# Altium PCB demo_dermis_main_testboard_scratch.PcbDoc (part 3 of 7)
Units mm, origin at the board's own origin, x right, y up, seen from the top; angles counter-clockwise.
Board outline 348.67 x 247.5 mm, 4 copper layers (Top Layer, Layer 1, Layer 2, Bottom Layer), stack 0.603 mm thick; 416 components, 288 nets, 1934 pads, 1690 vias.
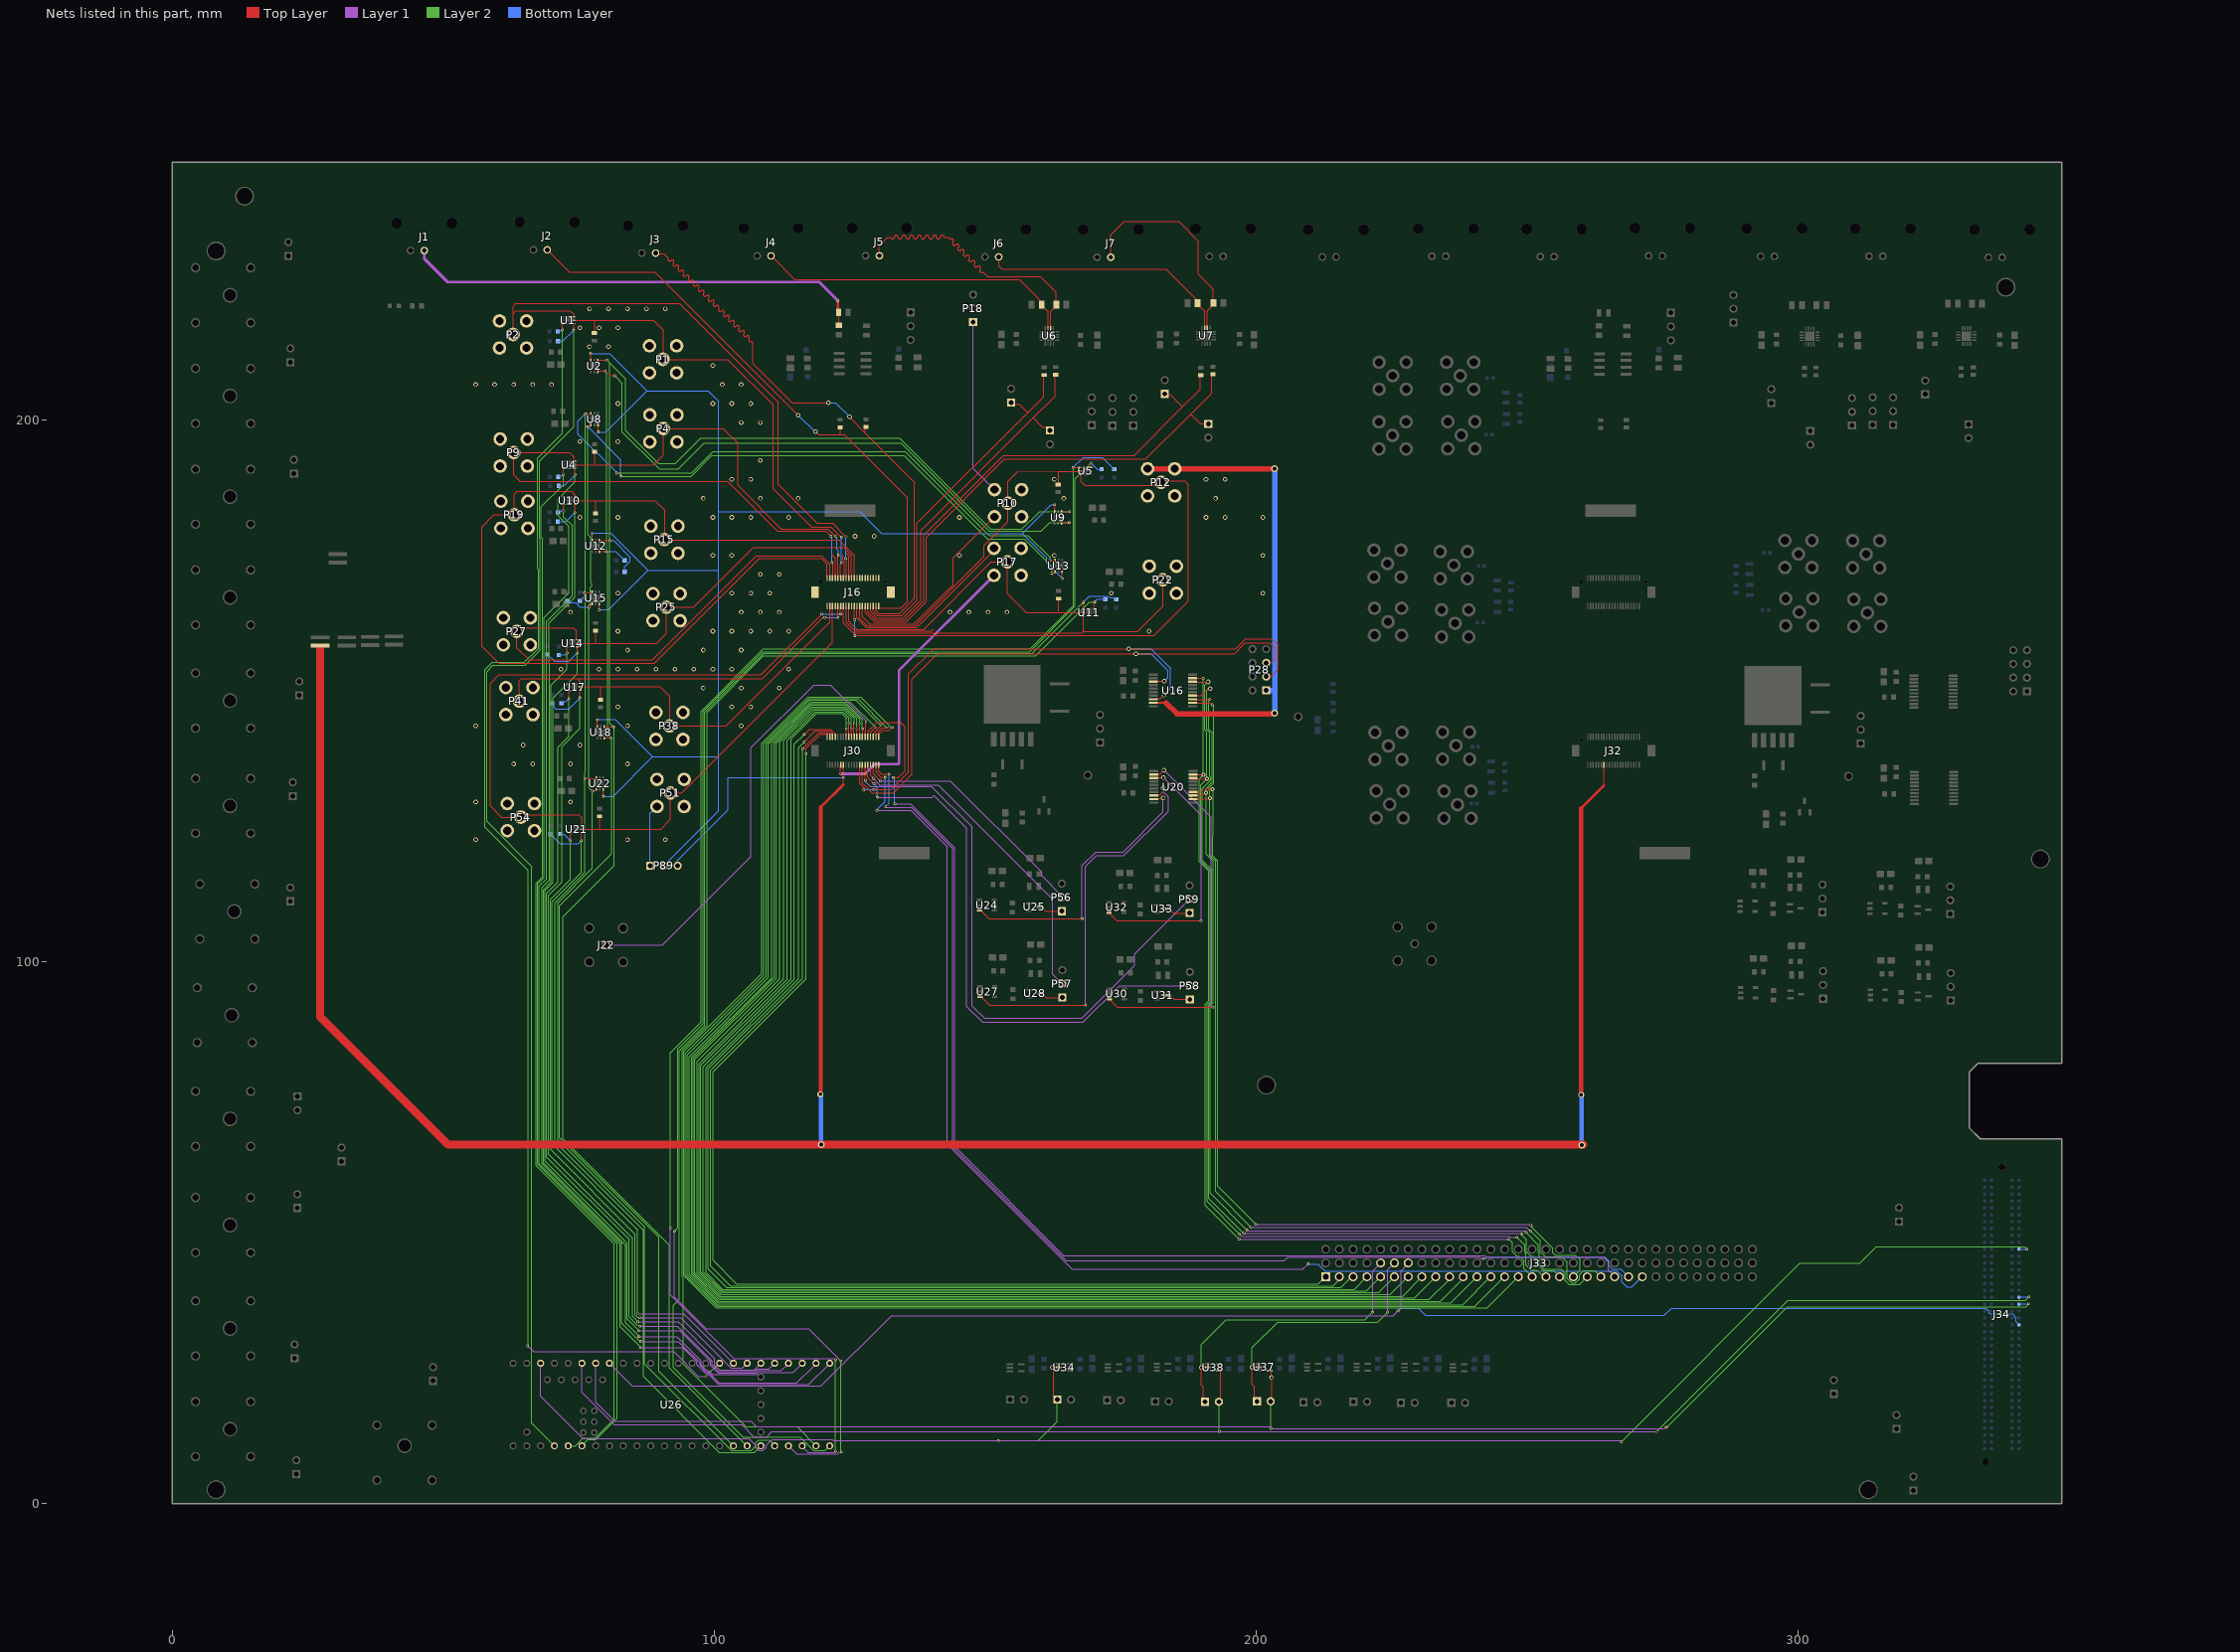
[diagram p4: the nets of this part, all layers, seen from the top]

## Via types
v1: diameter 0.85, hole 0.5, Top Layer to Bottom Layer, 1036 vias
v2: diameter 0.5, hole 0.3, Top Layer to Bottom Layer, 455 vias
v3: diameter 1.27, hole 0.711, Top Layer to Bottom Layer, 133 vias
v4: diameter 0.7, hole 0.4, Top Layer to Bottom Layer, 26 vias
v5: diameter 0.4, hole 0.25, Top Layer to Bottom Layer, 24 vias
v6: diameter 1.1, hole 0.7, Top Layer to Bottom Layer, 16 vias

## Nets (pads, with @x,y where several pads share a name; then routed paths per layer and width w, separated by ;. In a path a pad name is that pad's centre, name@x,y a point inside that pad or via, vN(x,y) a via of type N, cw(c..) or ccw(c..) an arc to the next point about the centre after c; other vN are vias at no path point) (continued)
ACK_EXT: J34.C11 P60.1 U26.1 U34.2 | length 326.3
  Top Layer w0.15: P60.1@163.298,19.176 162.622,19.851 162.622,24.719 162.397,24.945 v1(162.397,25.134) 162.399,25.136 163.543,25.136 U34.2@163.545,25.138
  Layer 1 w0.15: U26.1@67.985,25.89 67.985,19.817 75.792,12.011 106.392,12.011 107.652,10.75 107.652,10.38 108.261,9.771 108.99,9.771 109.599,10.38 109.599,10.75 110.459,11.611 110.53,11.611 110.698,11.779 121.793,11.779 121.961,11.611 267.052,11.611 267.267,11.395 v2(267.362,11.395)
  Layer 2 w0.15: v2(152.432,11.611) 159.75,11.611 163.298,15.159 P60.1@163.298,19.176 ; v2(267.362,11.395) 300.332,44.365 311.386,44.365 314.386,47.365 341.796,47.365 v2(342.218,46.943)
  Bottom Layer w0.15: J34.C11@340.746,46.956 340.752,46.949 342.212,46.949 v2(342.218,46.943)
ADDRX0: J33.14 P65.1 U38.2 | length 55.9
  Top Layer w0.15: P65.1@190.245,18.519 190.245,21.547 189.879,21.913 v1(189.879,25.129) v1(189.879,25.129) 191.026,25.132 U38.2@191.028,25.134
  Layer 1 w0.15: v2(221.451,35.324) 221.474,35.348 221.474,42.912 J33.14@222.964,44.403
  Layer 2 w0.15: v1(189.879,25.129) 189.879,29.364 194.464,33.949 220.074,33.949 v2(221.451,35.324)
ADDRX0_EXT: J34.C18 P65.2 U26.4 U38.4 | length 299.6
  Top Layer w0.15: U38.4@193.337,24.484 193.357,24.484 193.46,24.381 P65.2@193.46,18.785
  Layer 1 w0.15: U26.4@75.605,25.89 75.605,20.533 75.614,20.533 81.577,14.57 105.105,14.57 107.365,12.311 109.703,12.311 110.671,13.279 v2(193.214,13.279) 193.232,13.26 273.826,13.26 v2(273.844,13.242)
  Layer 2 w0.15: P65.2@193.123,18.785 193.169,18.739 193.169,13.324 v2(193.214,13.279) ; v2(273.844,13.242) 298.132,37.53 341.97,37.53 v2(342.577,38.138)
  Bottom Layer w0.15: J34.C18@340.746,38.066 340.781,38.102 342.541,38.102 v2(342.577,38.138)
ADDRY0: J33.17 P64.1 U37.2 | length 48.9
  Top Layer w0.15: P64.1@199.674,18.519 199.674,21.541 199.252,21.964 v1(199.252,25.174) 199.254,25.176 200.398,25.176 U37.2@200.4,25.179
  Layer 1 w0.15: v2(224.284,35.334) 224.284,43.182 J33.17@225.504,44.403
  Layer 2 w0.15: v1(199.252,25.174) 199.252,28.77 203.984,33.503 222.452,33.503 v2(224.284,35.334)
ADDRY0_EXT: J34.C19 P64.2 U26.5 U37.4 | length 297.1
  Top Layer w0.15: U37.4@202.483,24.528 202.727,24.528 202.83,24.426 202.83,23.312 202.89,23.252 P64.2@202.89,18.872 ; v1(202.83,23.252) U37.4@202.83,24.528
  Layer 1 w0.15: U26.5@78.145,25.89 78.145,18.675 81.633,15.186 106.817,15.186 107.784,14.219 202.371,14.219 v2(202.717,13.874) 275.345,13.874 275.562,14.091 v2(275.657,14.091)
  Layer 2 w0.15: P64.2@202.675,18.872 202.696,18.851 202.696,13.894 v2(202.717,13.874) ; v2(275.657,14.091) 275.772,14.091 298.023,36.342 342.004,36.342 v2(342.495,36.833)
  Bottom Layer w0.15: J34.C19@340.746,36.796 340.764,36.814 342.476,36.814 v2(342.495,36.833)
AER_DIS: J33.20 J34.C22 U26.6 | length 280.4
  Layer 1 w0.15: U26.6@80.685,25.89 84.886,21.689 119.721,21.689 132.694,34.662 225.268,34.662 v2(226.156,35.55) 226.71,36.104 226.71,42.93 228.044,44.264 J33.20@228.044,44.403
  Bottom Layer w0.15: v2(226.156,35.55) 226.626,36.02 229.926,36.02 231.219,34.727 275.266,34.727 276.609,36.071 334.621,36.071 335.12,35.571 335.12,35.3 335.44,34.981 335.891,34.981 339.521,34.981 340.176,34.325 340.176,33.555 J34.C22@340.746,32.986
AGND: J30.28 J32.28 P89.3 R16.2 | length 494.6
  Top Layer w0.2: 123.836,132.662 v5(123.836,133.975) J30.28@123.836,136.465 ; 264.169,132.527 J32.28@264.169,136.33
  Top Layer w0.5: 119.668,128.494 123.836,132.662 ; 259.969,128.327 264.169,132.527
  Top Layer w0.8: v6@119.668,75.99 119.668,128.494 ; v6@259.969,75.888 259.969,128.327
  Top Layer w1.5: 27.31,157.646 27.31,89.827 50.888,66.249 v3@260.345,66.249
  Bottom Layer w0.2: P89.3@93.273,117.712 93.243,117.742 93.243,118.712 102.557,128.026 102.557,133.975 v5(123.836,133.975)
  Bottom Layer w0.8: v3@119.681,66.359 v6@119.681,75.474 ; v3@260.015,66.225 v6@260.015,75.339
  other v3: 260.088,66.152 119.754,66.286
  other v6: 259.942,75.412 119.608,75.547
AGND_VCM: P89.2 U2.3 U8.3 U9.3 U12.3 U13.3 U15.3 U18.3 U22.3 | length 292.8
  Top Layer w0.15: v2(77.214,212.25) 77.214,211.019 U2.3@77.241,210.991 ; v2(77.482,179.079) 77.482,177.848 77.51,177.821 U12.3@77.49,177.713 ; U18.3@78.418,143.334 78.446,143.378 78.418,143.406 v2(78.418,144.637) ; U8.3@78.571,199.095 78.574,199.016 78.601,198.988 v2(78.601,197.757) ; U15.3@78.764,166.202 78.791,166.175 v2(78.791,164.943) ; U22.3@79.529,131.82 79.514,131.783 79.542,131.756 v2(79.542,130.525) ; v2(162.825,184.321) 162.825,183.09 U9.3@162.853,183.062 ; v2(164.218,170.718) 164.218,171.95 164.191,171.977 U13.3@164.22,172.008
  Bottom Layer w0.15: v2(78.601,197.757) 79.974,197.757 ; 87.588,205.354 87.588,205.37
  Bottom Layer w0.2: v2(77.214,212.25) 80.709,212.25 87.588,205.37 79.974,197.757 ; v2@77.453,179.12 80.948,179.12 87.828,172.241 80.555,164.969 v2@78.791,164.969 ; v2@78.252,144.688 78.418,144.688 81.747,144.688 88.626,137.809 81.338,130.52 v2@79.542,130.52 ; 87.588,205.354 98.862,205.354 100.837,203.378 100.837,183.083 100.837,172.224 ; 87.828,172.224 100.837,172.224 ; 88.626,137.791 100.817,137.791 ; P89.2@90.733,117.712 100.837,127.816 100.837,137.791 100.837,172.224 ; 100.864,183.083 126.818,183.083 130.88,179.021 156.835,179.021 ; v2(162.825,184.321) 162.134,184.321 156.835,179.021 ; v2(164.218,170.718) 161.362,173.574 161.362,174.494 156.835,179.021
CHIPA_ACK: J30.37 J33.4 | length 227.9
  Top Layer w0.15: v2(116.35,139.283) 119.348,142.282 121.062,142.282 121.345,141.999 J30.37@121.345,141.48
  Layer 2 w0.15: 103.007,40.169 103.012,40.169 ; v2(116.35,139.283) 116.304,139.238 116.304,96.898 99.341,79.935 99.341,43.841 103.012,40.169 ; J33.4@215.344,41.863 215.344,41.341 214.172,40.169 103.012,40.169
CHIPA_ADDRX0: J30.25 J33.13 | length 248.6
  Top Layer w0.15: J30.25@124.345,141.48 124.36,141.495 124.36,143.017 v5(124.374,143.032)
  Layer 2 w0.15: v5(124.374,143.032) v5(124.374,143.032) 124.373,145.011 123.556,145.829 118.915,145.829 114.182,141.095 114.182,96.81 97.992,80.619 97.992,42.722 101.461,39.252 101.478,39.252 220.354,39.252 J33.13@222.964,41.863
CHIPA_ADDRY0: J30.23 J33.16 | length 253
  Top Layer w0.15: J30.23@124.845,141.48 124.849,141.485 v5(124.848,144.049) ; v5(124.848,144.049) v5(124.848,144.049)
  Layer 2 w0.15: v5(124.848,144.049) 124.848,145.022 123.741,146.129 118.731,146.129 114.044,141.442 114.038,141.442 113.836,141.239 113.836,141.233 113.438,140.835 113.438,96.74 97.551,80.853 97.551,42.738 101.337,38.953 101.37,38.953 222.594,38.952 J33.16@225.504,41.863
CHIPA_AER_DIS: J30.21 J33.19 | length 257.5
  Top Layer w0.15: v5(125.324,143.026) 125.335,143.015 125.335,141.491 J30.21@125.345,141.48
  Layer 2 w0.15: v5(125.324,143.026) 125.324,145.056 123.951,146.429 118.474,146.429 112.87,140.826 112.87,96.867 97.205,81.201 97.205,42.661 101.299,38.566 101.373,38.566 224.748,38.566 J33.19@228.044,41.863
CHIPA_CATTN_SCL: R65.2 U2.6 U9.6 U12.6 U18.6 U26.40 | length 333.3
  Top Layer w0.15: U2.6@78.541,208.934 78.611,209.003 v2(79.927,209.003) 80.785,208.145 v2(81.63,208.145) ; U12.6@78.939,175.699 v2(80.096,175.699) ; U18.6@79.717,141.277 79.781,141.317 79.794,141.304 v2(80.932,141.304) ; U9.6@164.118,180.966 164.218,181.024 v2(165.534,181.024)
  Layer 2 w0.15: v2(79.927,209.003) 80.087,208.843 80.088,175.85 80.239,175.699 v2(80.096,175.699) 80.26,175.536 80.26,142.154 80.932,141.482 v2(80.932,141.304) 81.098,141.138 81.098,119.909 71.486,110.297 71.486,67.505 89.849,49.142 89.849,24.346 U26.40@103.545,10.65 ; v2(81.63,208.145) 83.067,206.709 83.067,197.724 89.887,190.903 93.401,190.903 98.193,195.696 134.455,195.696 139.94,190.211 139.984,190.211 150.699,179.496 160.351,179.496 161.878,181.024 v2(165.534,181.024)
  Bottom Layer w0.15: v2(80.096,175.699) 81.875,175.699 83.473,174.101 R65.2@83.473,174.079
CHIPA_CATTN_SDA: R64.2 U2.1 U9.1 U12.1 U18.1 U26.39 | length 342.2
  Top Layer w0.15: U2.1@78.541,210.991 78.561,211.012 v2(80.233,211.012) ; U12.1@78.79,177.713 78.889,177.707 v2(80.763,177.707) ; U18.1@79.732,143.324 v2(81.403,143.324) ; U9.1@164.118,183.023 164.169,183.031 164.18,183.042 v2(165.579,183.042)
  Layer 2 w0.15: v2(80.233,211.012) 80.763,210.481 ; U26.39@106.085,10.65 91.724,25.011 91.724,47.691 72.114,67.302 72.114,108.326 81.573,117.785 81.573,143.155 v2(81.403,143.324) 80.763,143.965 v2(80.763,177.707) 80.749,177.722 80.749,208.403 80.763,208.417 80.763,210.481 ; v2(165.579,183.042) 160.036,183.042 156.789,179.796 151.018,179.796 134.178,196.637 97.541,196.637 92.87,191.966 89.734,191.966 83.693,198.007 83.693,207.552 80.763,210.481
  Bottom Layer w0.15: v2(80.763,177.707) 81.454,177.707 84.533,174.629 84.533,173.922 83.476,172.865 R64.2@83.476,171.945
CHIPA_CATTP_SCL: R63.2 U8.6 U13.6 U15.6 U22.6 U26.38 | length 326.8
  Top Layer w0.15: v2(76.11,168.093) 77.507,168.093 U15.6@77.547,168.133 ; v2(76.139,133.82) 78.089,133.82 78.137,133.868 U22.6@78.156,133.849 ; v2(76.265,201.128) 77.24,201.128 77.244,201.124 U8.6@77.272,201.152 ; v2(161.954,174.036) U13.6@162.929,174.036
  Layer 2 w0.15: v2(76.11,168.093) 76.11,200.879 76.265,201.033 v2(76.265,201.128) ; v2@76.113,168.099 76.113,166.598 76.138,134.892 76.138,133.822 v2(76.139,133.82) 76.169,133.791 76.169,116.425 70.653,110.909 70.653,66.72 86.938,50.435 86.938,23.474 100.941,9.471 107.446,9.471 U26.38@108.625,10.65 ; v2(82.004,190.171) 95.817,190.171 99.801,194.155 135.193,194.155 150.714,178.634 157.896,178.634 161.954,174.576 v2(161.954,174.036)
  Bottom Layer w0.15: R63.2@75.211,166.603 75.233,166.603 76.11,167.48 v2(76.11,168.093) ; v2(76.265,201.128) 74.895,199.759 74.895,197.4 82.004,190.291 v2(82.004,190.171)
CHIPA_CATTP_SDA: R62.2 U8.1 U13.1 U15.1 U22.1 U26.37 | length 324.8
  Top Layer w0.15: v2(76.664,198.74) 76.664,198.774 76.756,198.865 77.194,198.865 77.272,198.943 U8.1@77.272,199.095 ; v2(76.921,165.41) 77.275,165.764 77.275,165.753 U15.1@77.412,165.89 ; v2@77.672,131.586 U22.1@78.11,131.586 ; v2@162.445,171.773 U13.1@162.883,171.773
  Layer 2 w0.15: v2(76.664,198.74) 76.633,198.74 76.654,198.719 76.654,178.857 77.239,178.272 77.239,169.97 77.382,169.827 77.382,169.309 77.189,169.116 77.189,166.092 76.921,165.825 v2(76.921,165.41) 76.921,132.085 v2(77.546,131.46) 77.546,117.273 71.186,110.913 71.186,67.081 87.188,51.079 87.188,25.764 103.181,9.771 106.859,9.771 107.737,10.649 107.737,11.238 108.268,11.769 110.154,11.769 111.165,10.758 U26.37@111.165,10.65 ; v2(82.778,189.592) 95.744,189.592 99.569,193.416 134.982,193.416 150.423,177.975 157.24,177.975 162.319,172.896 v2(162.319,171.648)
  Bottom Layer w0.15: R62.2@72.904,166.56 73.207,166.257 74.461,166.257 75.265,165.453 v2@76.958,165.453 ; v2(76.664,198.74) 76.664,198.705 82.778,192.592 v2(82.778,189.592)
CHIPA_CLK: J22.1 J30.11 | length 85.4
  Top Layer w0.2: J30.11@127.845,141.48 127.845,142.475 128.005,142.635 v5(128.005,144.257)
  Layer 1 w0.2: J22.1@80.069,103.068 90.485,103.068 106.799,119.382 106.799,139.443 118.407,151.051 121.46,151.051 128.005,144.506 v5(128.005,144.257)
CHIPA_CSb_IDAC: J33.55 U20.14 | length 154.7
  Top Layer w0.2: U20.14@187.876,131.301 U20.14@188.359,131.301 189.748,131.301 190.318,131.871 191.878,131.871 191.907,131.841 v4(191.943,131.841)
  Layer 1 w0.15: v2(199.914,51.552) 250.363,51.552 250.614,51.302 v2(250.708,51.302)
  Layer 2 w0.15: v4(191.943,131.841) 192.107,131.677 192.107,123.073 192.022,122.988 192.022,119.471 192.893,118.6 192.893,58.573 v2(199.914,51.552) ; v2(250.708,51.302) 250.708,51.163 254.722,47.15 254.722,46.282 255.155,45.848 258.873,45.848 259.731,44.99 259.731,43.07 J33.55@258.524,41.863
CHIPA_CSb_VDAC: J33.52 U16.14 | length 172.6
  Top Layer w0.2: U16.14@188.51,149.1 188.524,149.086 189.853,149.086 v1@191.359,150.593
  Layer 1 w0.15: v2(197.702,49.875) 248.729,49.875 248.873,49.73 v2(248.968,49.73)
  Layer 2 w0.15: v1@191.359,150.593 190.841,150.074 190.841,142.897 191.45,142.288 191.45,134.141 191.571,134.02 191.571,133.481 190.099,132.009 190.099,118.707 191.806,117.001 191.806,92.516 191.245,91.956 191.245,56.332 v2(197.702,49.875) ; v2@248.955,49.872 248.955,49.581 249.854,48.682 249.854,46.508 250.689,45.673 251.119,45.673 251.954,44.837 251.954,43.983 252.952,42.986 254.861,42.986 J33.52@255.984,41.863
  other v1: 191.512,150.42
CHIPA_CT_MODE: J30.15 J33.28 | length 270.7
  Top Layer w0.15: v5(126.817,143.991) 126.845,143.963 J30.15@126.845,141.48
  Layer 2 w0.15: v5(126.817,143.991) 126.817,144.837 124.324,147.329 117.969,147.329 111.041,140.401 111.041,97.089 96.151,82.199 96.151,42.441 100.94,37.652 100.999,37.652 231.901,37.652 235.511,41.261 235.511,41.709 J33.28@235.664,41.863
CHIPA_DIG_RES0: J30.7 J33.34 | length 280.5
  Top Layer w0.15: J30.7@128.845,141.48 128.895,141.53 128.895,142.324 v5(129.775,143.204)
  Layer 2 w0.15: v5(129.775,143.204) 125.024,147.954 117.746,147.954 110.016,140.225 110.016,97.086 95.359,82.428 95.359,42.385 100.692,37.052 100.739,37.052 235.933,37.052 J33.34@240.744,41.863
CHIPA_DIG_RES1: J30.5 J33.37 | length 285.8
  Top Layer w0.15: J30.5@129.345,141.48 129.395,141.53 129.395,142.152 130.753,143.51 v5(130.753,143.609)
  Layer 2 w0.15: v5(130.753,143.609) 126.108,148.254 117.615,148.254 115.826,146.465 115.826,146.458 109.575,140.207 109.575,97.344 95.013,82.782 95.013,42.307 100.627,36.693 100.672,36.693 238.114,36.693 J33.37@243.284,41.863
CHIPA_DIG_RES2: J30.3 J33.40 | length 291.6
  Top Layer w0.15: J30.3@129.845,141.48 129.845,141.999 131.035,143.188 v5(132.041,143.188)
  Layer 2 w0.15: v5(132.041,143.188) 131.845,143.188 126.48,148.554 117.491,148.554 109.191,140.254 109.191,97.601 94.713,83.122 94.713,42.183 100.502,36.393 100.544,36.393 240.355,36.393 J33.40@245.824,41.863
CHIPA_DIG_RES3: J30.1 J33.43 | length 296.6
  Top Layer w0.15: J30.1@130.345,141.48 130.345,141.93 131.09,142.675 132.351,142.675 v2(132.927,143.251)
  Layer 2 w0.15: v2(132.927,143.251) 132.65,143.251 127.047,148.854 117.366,148.854 108.821,140.308 108.821,97.852 94.778,83.809 94.413,83.444 94.413,42.059 100.378,36.093 100.392,36.093 242.594,36.093 J33.43@248.364,41.863
CHIPA_GAIN_HI: J30.13 J33.31 | length 274.9
  Top Layer w0.15: J30.13@127.345,141.48 127.372,141.508 127.372,142.957 v2(127.4,142.984)
  Layer 2 w0.15: v2(127.4,142.984) 127.347,143.037 127.347,144.731 124.424,147.654 117.87,147.654 110.591,140.375 110.591,97.063 95.852,82.324 95.852,42.317 100.816,37.352 100.844,37.352 234.029,37.352 238.204,41.527 J33.31@238.204,41.863
CHIPA_IBIAS: J30.12 P59.2 | length 110.7
  Top Layer w0.2: J30.12@127.845,136.33 127.87,136.305 127.87,133.483 v2(127.918,133.435)
  Layer 1 w0.2: v2(127.918,133.435) 127.918,133.187 128.781,132.324 140.107,132.324 147.559,124.871 147.559,91.836 149.841,89.555 167.884,89.555 177.602,99.273 177.602,101.436 P59.2@187.698,111.532
CHIPA_IBIAS_ADAPT: J30.10 P58.2 | length 103.9
  Top Layer w0.2: J30.10@128.345,136.33 128.345,133.971 129.134,133.183 129.451,132.866 129.458,132.874 v2(129.476,132.874)
  Layer 1 w0.2: v2(130.105,130.343) 140.268,130.343 140.568,130.643 146.593,124.617 146.593,91.718 149.479,88.832 168.049,88.832 174.798,95.582 P58.2@187.763,95.582
  Bottom Layer w0.2: v2(129.476,132.874) 129.476,132.785 130.105,132.157 v2(130.105,130.343)
CHIPA_IBIAS_ADAPT_PRE: P58.1 U31.3 | length 4.4
  Top Layer w0.2: U31.3@183.711,93.819 184.054,93.819 184.831,93.042 P58.1@187.763,93.042
CHIPA_IBIAS_AFE: J30.8 P57.2 | length 61.4
  Top Layer w0.2: J30.8@128.845,136.33 128.845,134.338 129.326,133.857 v2(129.326,133.845)
  Layer 1 w0.2: v2(129.326,133.845) 129.338,133.845 130.534,132.649 141.339,132.649 162.441,111.547 162.441,97.708 P57.2@164.233,95.915
CHIPA_IBIAS_AFE_PRE: P57.1 U28.3 | length 4.4
  Top Layer w0.2: U28.3@160.181,94.153 160.524,94.153 161.301,93.375 P57.1@164.233,93.375
CHIPA_IBIAS_PRE: P59.1 U33.3 | length 4.4
  Top Layer w0.2: U33.3@183.645,109.769 183.988,109.769 184.765,108.992 P59.1@187.698,108.992
CHIPA_IBIAS_SLEW: J30.6 P56.2 | length 46.5
  Top Layer w0.2: J30.6@129.345,136.33 129.345,134.676 v2(130.641,133.38)
  Layer 1 w0.2: v2(130.641,133.38) 143.597,133.38 160.392,116.585 160.392,115.889 164.132,112.149 P56.2@164.132,111.867
CHIPA_IBIAS_SLEW_PRE: P56.1 U25.3 | length 4.4
  Top Layer w0.2: U25.3@160.08,110.104 160.423,110.104 161.2,109.327 P56.1@164.132,109.327
CHIPA_LDACb: J33.49 U16.18 U20.18 | length 173.6
  Top Layer w0.2: U20.18@187.981,133.749 190.919,133.749 v4(190.921,133.751) ; U20.18@188.326,133.868 U20.18@188.359,133.901 ; U16.18@188.504,151.714 188.607,151.611 191.095,151.611 v1(191.13,151.645)
  Layer 1 w0.15: v2(196.911,49.722) 197.312,49.32 246.776,49.32 246.955,49.141 v2(248.117,49.141)
  Layer 2 w0.15: v1(191.13,151.645) 190.541,151.056 190.541,142.773 190.919,142.394 190.919,133.753 v4(190.921,133.751) 189.799,132.628 189.799,118.583 191.505,116.876 191.505,92.64 190.946,92.08 190.946,55.75 v2@196.909,49.72 ; v2@248.112,49.136 249.554,47.693 249.554,46.383 249.766,46.172 249.766,44.056 250.763,43.059 251.767,43.059 252.963,41.863 J33.49@253.444,41.863
CHIPA_RATIOMODE0: J30.19 J33.22 | length 261.8
  Top Layer w0.15: v5(125.831,144.007) 125.799,143.975 125.799,141.526 J30.19@125.845,141.48
  Layer 2 w0.15: v5(125.831,144.007) 125.831,144.974 124.076,146.729 118.284,146.729 112.031,140.477 112.032,96.703 96.905,81.576 96.905,42.536 101.174,38.267 101.202,38.267 226.988,38.267 J33.22@230.584,41.863
CHIPA_RATIOMODE1: J30.17 J33.25 | length 266.2
  Top Layer w0.15: v5(126.274,143.047) 126.345,142.977 J30.17@126.345,141.48
  Layer 2 w0.15: v5(126.274,143.047) 126.306,143.079 126.306,144.923 124.2,147.029 118.094,147.029 111.438,140.373 111.438,96.934 96.452,81.948 96.452,42.565 101.065,37.952 101.117,37.952 229.214,37.952 J33.25@233.124,41.863
CHIPA_REQOFF: J30.33 J33.10 | length 238
  Top Layer w0.15: v2(116.652,141.95) 117.613,142.91 121.434,142.91 122.345,141.999 J30.33@122.345,141.48
  Layer 2 w0.15: v2(116.652,141.95) 114.79,140.088 114.79,96.737 98.486,80.433 98.486,42.652 101.586,39.553 101.615,39.553 218.114,39.553 J33.10@220.424,41.863
CHIPA_REQON: J30.35 J33.7 | length 232.7
  Top Layer w0.15: v2(116.574,140.536) 118.619,142.581 121.262,142.581 121.845,141.999 J30.35@121.845,141.48
  Layer 2 w0.15: v2(116.574,140.536) 115.547,139.51 115.547,96.876 98.884,80.214 98.884,43.235 102.249,39.87 102.272,39.87 215.645,39.87 217.638,41.863 J33.7@217.884,41.863
CHIPA_RESETb: J33.46 U16.19 U20.19 | length 170
  Top Layer w0.15: U16.19@188.253,152.336 188.314,152.336 188.364,152.286 v2(190.225,152.286)
  Top Layer w0.2: U20.19@188.359,134.551 188.378,134.532 190.251,134.532 v4(190.269,134.513)
  Layer 1 w0.15: v2(196.854,48.826) v2@246.325,48.826
  Layer 2 w0.15: v2(190.225,152.286) 190.225,134.557 v4(190.269,134.513) 189.499,133.743 189.499,118.458 191.206,116.752 191.206,92.764 190.645,92.204 190.645,55.034 v2(196.854,48.826) ; v2@246.325,48.826 246.607,48.826 247.314,48.119 247.314,46.508 248.149,45.673 248.579,45.673 249.414,44.837 249.414,43.353 J33.46@250.904,41.863
  other v2: 246.559,48.795
CHIPA_RST: J30.39 J33.1 | length 222.5
  Top Layer w0.15: v2(116.954,138.364) 117,138.41 117,139.378 119.603,141.981 120.855,141.981 120.855,141.49 J30.39@120.845,141.48
  Layer 2 w0.15: v2(116.954,138.364) 116.954,96.802 99.798,79.646 99.77,79.646 99.77,44.897 104.154,40.512 104.184,40.512 211.453,40.512 J33.1@212.804,41.863
CHIPA_SCLK: J33.58 U16.13 U20.13 | length 178.9
  Top Layer w0.2: U20.13@187.894,130.704 190.137,130.704 190.629,131.196 v4(190.749,131.196) ; U16.13@188.507,148.453 188.573,148.387 188.61,148.424 v2(191.491,148.424)
  Layer 1 w0.15: v2(198.306,50.463) 198.443,50.326 249.444,50.326 249.715,50.056 v2(249.81,50.056)
  Layer 2 w0.15: v2(191.491,148.424) 191.25,148.183 191.25,142.912 191.871,142.291 191.871,133.113 190.749,131.991 v4(190.749,131.196) 190.749,119.895 192.105,118.539 192.105,92.462 191.803,92.16 191.495,91.852 191.495,57.274 v2(198.306,50.463) ; v2(249.81,50.056) 249.81,49.946 252.094,47.662 252.094,46.383 252.254,46.223 252.254,44.108 253.076,43.286 256.241,43.286 257.034,42.493 257.034,41.158 257.773,40.419 259.621,40.419 J33.58@261.064,41.863
CHIPA_SDI: J33.61 U16.12 U20.12 | length 181
  Top Layer w0.2: U16.12@188.253,147.786 188.253,147.886 188.39,147.749 191.399,147.749 191.724,147.424 v2(191.9,147.424) ; U20.12@188.359,130.001 188.19,130.001 188.193,129.997 191.008,129.997 191.203,130.192 v4(191.457,130.192)
  Layer 1 w0.15: v2@199.017,50.997 249.851,50.997 250.487,50.361 v2(250.573,50.361)
  Layer 2 w0.15: v2(191.9,147.424) 192.171,147.152 192.171,132.989 191.293,132.11 191.293,131.572 191.457,131.408 v4(191.457,130.192) 191.457,119.612 192.496,118.573 192.496,91.902 192.545,91.852 192.545,91.417 192.496,91.367 192.496,57.568 198.889,51.174 v2@198.876,51.16 ; v2@250.559,50.347 252.394,48.512 252.394,46.508 253.376,45.526 256.346,45.526 257.334,44.537 257.334,41.568 258.182,40.72 258.866,40.72 259.623,41.477 259.623,42.261 260.381,43.019 262.448,43.019 J33.61@263.604,41.863
  other v2: 199.017,51.019
CHIPA_VBIAS: U20.3 U32.3 | length 49
  Top Layer w0.15: U20.3@181.094,133.901 181.152,133.958 v1(182.88,133.958)
  Top Layer w0.2: U32.3@172.508,109.145 172.74,109.145 172.845,109.039 174.3,107.584 v2(189.829,107.584)
  Layer 1 w0.2: v1(182.88,133.958) 189.829,127.01 v2(189.829,107.584)
CHIPA_VBIAS_ADAPT: U20.2 U30.3 | length 69.7
  Top Layer w0.2: U30.3@172.573,93.195 172.805,93.195 172.911,93.09 174.366,91.635 v2(192.02,91.635) ; U20.2@181.094,134.551 181.128,134.584 182.214,134.584 v1(182.966,135.336)
  Layer 1 w0.2: v1(182.966,135.336) 191.681,126.621 191.681,91.974 v2(192.02,91.635)
CHIPA_VBIAS_AFE: U20.8 U27.3 | length 72.6
  Top Layer w0.2: U27.3@149.043,93.528 149.275,93.528 150.836,91.968 v2(168.49,91.968) ; U20.8@181.094,130.651 181.206,130.762 182.214,130.762 182.799,131.348 v1(182.799,132.055)
  Layer 1 w0.2: v2(168.49,91.968) 168.49,117.546 170.521,119.576 175.586,119.576 183.773,127.763 183.773,130.444 182.799,131.418 v1(182.799,132.055)
CHIPA_VBIAS_SLEW: U20.9 U24.3 | length 52.9
  Top Layer w0.2: U24.3@148.942,109.48 149.174,109.48 150.735,107.92 v2(167.886,107.92) ; U20.9@181.094,130.001 181.21,130.116 182.711,130.116 v1(182.835,130.24)
  Layer 1 w0.2: v2@167.905,107.92 167.905,117.79 170.384,120.27 175.487,120.27 182.835,127.617 v1(182.835,130.24)
CHIPA_VCM: J16.1 J16.3 J16.5 J16.7 J16.9 J16.11 J16.13 J16.14 J16.15 J16.17 J16.18 J16.22 J16.23 J16.26 J16.27 J16.33 J16.34 J16.40 J16.S1 J16.S2 J30.30 P1.2 P2.2 P4.2 P9.2 P10.2 P12.2 P15.2 P17.2 P18.1 P19.2 P22.2 P25.2 P27.2 P28.1 P38.2 P41.2 P51.2 P54.2 P89.1 U16.9 | length 298.4
  Top Layer w0.15: 121.667,175.137 122.359,174.445 122.359,170.812 J16.33@122.346,170.799 ; 123.744,175.028 123.722,175.005 123.722,174.189 123.998,173.912 123.998,173.41 123.997,173.408 123.997,170.95 J16.27@123.846,170.799 ; 124.294,175.438 124.876,174.855 124.876,170.829 J16.23@124.846,170.799 ; J16.26@124.346,165.649 124.346,162.609 125.819,161.135 125.921,161.135 126.012,161.045 140.17,161.045 140.515,161.389
  Top Layer w0.2: v5@123.314,134.702 123.314,136.33 J30.30@123.345,136.33 ; J16.18@126.345,165.649 126.345,163.489 126.52,163.314 126.52,163.208 128.058,161.67 137.415,161.67 151.63,175.884 P17.2@151.63,176.285 ; J16.14@127.346,165.649 127.345,163.69 128.716,162.32 136.865,162.32 144.128,169.582 144.128,174.523 P10.2@151.719,182.114
  Top Layer w0.4: U16.9@181.36,147.791 183.337,147.791
  Top Layer w1: P12.2@179.971,190.963 P12.2@184.971,190.963 v3(203.409,190.963) ; 183.337,147.791 185.391,145.737 v3@203.145,145.737
  Layer 1 w0.2: P18.1@147.78,218.025 147.78,191.054 P10.2@151.719,187.114
  Layer 1 w0.5: v5(123.326,134.691) 127.854,134.691 129.648,136.485 133.977,136.485 134.094,136.602 134.094,153.75 P17.2@151.63,171.286
  Bottom Layer w0.15: P89.1@88.193,117.712 88.193,127.373 P51.2@89.456,128.636
  Bottom Layer w1: P28.1@201.856,150.075 201.906,150.024 203.414,150.024 ; v3(203.409,190.963) 203.409,150.03 203.414,150.024 ; v3(203.414,145.864) 203.414,150.024
  other v1: 56,122.5 84,122.5 91,122.5 56,129.5 73.5,129.5 63,136.5 66.5,136.5 73.5,136.5 84,136.5 64.75,140 75.25,140 56,143.5 84,143.5 105,143.5 82.25,147 103.25,147 106.75,147 98,150.5 105,150.5 112,150.5 71.75,154 78.75,154 82.25,154 85.75,154 89.25,154 92.75,154 96.25,154 99.75,154 103.25,154 113.75,154 84,157.5 98,157.5 105,157.5 82.25,161 99.75,161 103.25,161 106.75,161 110.25,161 113.75,161 180.25,161 73.5,164.5 105,164.5 108.5,164.5 112,164.5 143.5,164.5 147,164.5 150.5,164.5 154,164.5 82.25,168 103.25,168 106.75,168 110.25,168 173.25,168 201.25,168 108.5,171.5 112,171.5 99.75,175 103.25,175 145.25,175 162.75,175 201.25,175 126,178.5 129.5,178.5 75.25,182 82.25,182 99.75,182 103.25,182 106.75,182 113.75,182 145.25,182 190.75,182 194.25,182 201.25,182 98,185.5 108.5,185.5 115.5,185.5 164.5,185.5 192.5,185.5 103.25,189 106.75,189 162.75,189 190.75,189 194.25,189 108.5,192.5 75.25,196 82.25,196 105,199.5 108.5,199.5 82.25,203 99.75,203 103.25,203 106.75,203 56,206.5 59.5,206.5 63,206.5 66.5,206.5 70,206.5 101.5,206.5 105,206.5 99.75,210 77,213.5 80.5,213.5 75.25,217 78.75,217 82.25,217 77,220.5 80.5,220.5 84,220.5 87.5,220.5 91,220.5
CHIPA_VD: J30.4 J33.70 | length 222.2
  Top Layer w0.2: J30.4@129.845,136.33 129.845,134.98 130.812,134.013 v2(131.544,134.013)
  Layer 1 w0.2: v2(130.03,127.955) 136.29,127.955 143.011,121.235 143.011,66.263 166.028,43.246 208.603,43.246 v2(209.579,44.221)
  Bottom Layer w0.2: v2(130.03,127.955) 130.03,128.107 131.544,129.621 v2(131.544,134.013) ; v2(209.579,44.221) 211.465,44.221 212.749,42.938 266.589,42.938 267.499,42.028 267.499,40.888 268.408,39.979 269.34,39.979 J33.70@271.224,41.863
CHIPA_VG: J30.2 J33.67 | length 216
  Top Layer w0.2: J30.2@130.345,136.33 130.37,136.305 130.37,135.188 130.938,134.621 v2(132.259,134.621)
  Layer 1 w0.2: v2(131.645,128.627) 131.807,128.466 136.39,128.466 144.012,120.844 144.012,65.757 164.969,44.8 205.154,44.8 205.832,45.478 241.189,45.478 241.437,45.23 241.955,45.23 v2(241.987,45.198)
  Bottom Layer w0.2: v2(131.645,128.627) 132.259,129.241 v2(132.259,134.621) ; v2(241.987,45.198) 242.343,45.198 242.623,45.478 264.31,45.478 265.069,44.719 265.069,43.957 265.739,43.288 267.259,43.288 J33.67@268.684,41.863
CHIPA_VIN_SINGLEEND_OTA: J1.2 R5.2 R8.1 | length 85.5
  Top Layer w0.2: R5.2@122.973,217.412 R8.1@122.973,220.321
  Top Layer w0.5: R8.1@122.833,220.461 v2(122.833,221.999)
  Layer 1 w0.5: J1.2@46.515,231.242 46.515,229.736 50.825,225.427 119.406,225.427 v2(122.833,221.999)
CHIPA_VINN_REPLICA: J3.2 J16.4 R1.2 | length 111.7
  Top Layer w0.15: J3.2@89.198,230.777 89.317,230.659 90.752,230.659 91.091,230.319 91.55,229.86 ccw(c91.783,229.627) 92.015,229.395 cw(c92.248,229.162) 92.481,228.929 ccw(c92.713,228.697) 92.946,228.464 cw(c93.179,228.231) 93.411,227.999 ccw(c93.644,227.766) 93.877,227.534 cw(c94.109,227.301) 94.342,227.068 ccw(c94.574,226.836) 94.807,226.603 cw(c95.04,226.37) 95.272,226.138 ccw(c95.505,225.905) 95.738,225.672 cw(c95.97,225.44) 96.203,225.207 ccw(c96.436,224.975) 96.668,224.742 cw(c96.901,224.509) 97.134,224.277 ccw(c97.366,224.044) 97.599,223.811 cw(c97.831,223.579) 98.064,223.346 ccw(c98.297,223.113) 98.529,222.881 cw(c98.762,222.648) 98.995,222.415 ccw(c99.227,222.183) 99.46,221.95 cw(c99.693,221.718) 99.925,221.485 ccw(c100.158,221.252) 100.39,221.02 cw(c100.623,220.787) 100.856,220.554 ccw(c101.088,220.322) 101.321,220.089 cw(c101.554,219.856) 101.786,219.624 ccw(c102.019,219.391) 102.252,219.159 cw(c102.484,218.926) 102.717,218.693 ccw(c102.949,218.461) 103.182,218.228 cw(c103.415,217.995) 103.647,217.763 ccw(c103.88,217.53) 104.113,217.297 cw(c104.345,217.065) 104.578,216.832 ccw(c104.811,216.6) 105.043,216.367 cw(c105.276,216.134) 105.508,215.902 ccw(c105.741,215.669) 105.974,215.436 cw(c106.206,215.204) 106.439,214.971 ccw(c106.672,214.738) 106.904,214.506 107.179,214.232 107.179,210.373 114.4,203.151 v1(121.066,203.151)
  Top Layer w0.2: v1(124.986,200.57) 124.986,200.434 127.84,197.58 ; R1.2@127.84,198.475 127.84,197.58 ; J16.4@129.846,165.649 129.857,165.638 129.857,164.774 130.347,164.284 134.191,164.284 136.955,167.048 136.955,188.465 127.84,197.58
  Bottom Layer w0.15: v1(121.066,203.151) 122.405,203.151 v1(124.986,200.57)
CHIPA_VINN_X0: J16.20 P12.1 U5.3 | length 113.9
  Top Layer w0.15: J16.20@125.845,165.649 125.892,165.602 125.892,163.151 v2(125.939,163.105) ; v2(125.939,160.184) 181.131,160.184 187.508,166.561 187.508,188.024 186.803,188.729 182.736,188.729 P12.1@182.471,188.463 ; U5.3@167.449,189.9 167.601,189.9 167.704,189.798 167.704,188.637 168.406,187.934 181.225,187.934 182.113,188.822 P12.1@182.647,189.356
  Bottom Layer w0.15: v2(125.939,160.184) v2(125.939,163.105) v2@125.957,163.105
CHIPA_VINN_X1: J16.39 P19.1 U10.3 | length 121
  Top Layer w0.15: U10.3@74.34,185.749 74.34,186.148 73.653,186.834 63.684,186.834 63.142,186.292 P19.1@63.142,182.47 59.348,182.47 57.119,180.241 57.119,158.153 60.237,155.036 89.005,155.036 108.36,174.391 119.801,174.391 119.801,174.399 120.845,173.356 J16.39@120.846,170.799
CHIPA_VINN_Y0: J16.32 P41.1 U17.3 | length 70.7
  Top Layer w0.15: P41.1@64.07,148.091 64.07,151.913 64.416,152.26 74.776,152.26 ; U17.3@75.268,151.37 75.268,151.769 74.776,152.26 ; v2(120.4,163.511) 120.097,163.511 108.847,152.26 74.776,152.26 ; v2(122.816,163.514) 122.915,163.613 122.845,163.682 122.845,163.878 122.788,163.936 122.788,164.37 122.845,164.428 J16.32@122.845,165.649
  Bottom Layer w0.15: v2(120.4,163.511) 120.401,163.512 122.815,163.512 v2(122.816,163.514)
CHIPA_VINN_Y1: J16.25 P2.1 U1.3 | length 113.4
  Top Layer w0.15: P2.1@62.893,215.748 62.893,219.571 ; U1.3@74.091,219.027 74.091,219.426 73.404,220.112 63.435,220.112 62.893,219.571 ; v2(124.247,174.406) 124.401,174.252 124.401,170.885 124.33,170.814 J16.25@124.346,170.799 ; v2(124.34,178.413) 121.822,180.93 118.96,180.93 111.782,188.108 111.782,203.25 93.573,221.459 63.381,221.459 62.893,220.972 62.893,219.571
  Bottom Layer w0.15: v2(124.247,174.406) 124.293,174.453 124.293,178.391 v2@124.315,178.413
CHIPA_VINP_REPLICA: J2.2 J16.2 R2.2 | length 111.7
  Top Layer w0.2: J2.2@69.207,231.369 73.305,227.271 89.091,227.271 v1(115.496,200.867) ; v1(118.713,197.798) 119.223,197.287 123.318,197.287 ; R2.2@123.265,198.617 123.318,198.564 123.318,197.287 ; J16.2@130.341,165.644 J16.2@130.346,165.649 ; J16.2@130.39,165.288 134.492,165.288 135.695,166.491 135.695,185.622 124.03,197.287 123.318,197.287
  Bottom Layer w0.2: v1(115.496,200.867) 118.565,197.798 v1(118.713,197.798)
CHIPA_VINP_X0: J16.28 P22.1 U11.3 | length 72.6
  Top Layer w0.15: J16.28@123.846,165.649 123.845,162.524 125.656,160.714 167.907,160.714 168.143,160.95 ; U11.3@168.094,163.824 168.094,160.999 168.143,160.95 ; P22.1@182.784,170.485 182.784,165.596 178.139,160.95 168.143,160.95
CHIPA_VINP_X1: J16.37 P27.1 U14.3 | length 86.1
  Top Layer w0.15: U14.3@74.849,159.38 74.696,159.38 74.594,159.483 74.594,161.006 74.014,161.586 64.213,161.586 P27.1@63.597,160.969 63.597,157.961 65.845,155.713 88.62,155.713 107.76,174.852 119.819,174.852 121.345,173.326 J16.37@121.346,170.799
CHIPA_VINP_Y0: J16.30 P54.1 U21.3 | length 113.7
  Top Layer w0.15: U21.3@75.593,125.093 75.593,126.559 75.058,127.095 64.755,127.095 P54.1@64.342,126.681 60.78,126.681 58.674,128.787 58.674,151.329 60.295,152.951 108.64,152.951 v2(119.855,164.165) ; v2(123.313,164.153) 123.313,165.617 J16.30@123.346,165.649
  Bottom Layer w0.15: v2(119.855,164.165) 119.861,164.159 123.307,164.159 v2(123.313,164.153)
CHIPA_VINP_Y1: J16.35 P9.1 U4.3 | length 87.6
  Top Layer w0.15: U4.3@74.278,192.368 74.125,192.368 74.125,193.175 73.344,193.956 P9.1@63.025,193.956 63.025,189.813 63.038,189.813 63.968,188.883 64.173,188.679 102.436,188.679 111.625,179.49 120.595,179.49 v2@121.56,178.524 ; v2(121.723,173.691) 121.884,173.53 121.884,170.924 121.802,170.843 J16.35@121.846,170.799
  Bottom Layer w0.15: v2(121.559,178.522) 121.559,178.428 121.723,178.263 121.723,173.813 v2@121.784,173.752
CHIPA_VN_X0: J16.16 P10.1 R14.2 U5.2 | length 67.5
  Top Layer w0.15: J16.16@126.846,165.649 126.845,163.342 128.181,162.006 128.569,162.006 128.581,161.994 137,161.994 149.808,174.803 149.808,176.777 154.219,181.188 P10.1@154.219,184.615 ; P10.1@154.922,184.615 154.17,185.367 154.17,188.612 156.101,190.543 163.51,190.509 ; R14.2@163.453,188.041 163.51,188.097 163.51,190.509 ; 163.51,190.511 163.51,190.509 ; 163.612,190.491 U5.2@167.288,190.491 ; U5.2@167.612,190.491 167.449,190.491 163.51,190.509
CHIPA_VN_X1: J16.19 P15.1 R19.2 U10.2 | length 64.8
  Top Layer w0.15: U10.2@74.504,185.109 78.181,185.109 ; R19.2@78.125,182.73 78.181,182.787 78.181,185.109 ; P15.1@90.82,177.884 90.898,177.807 122.978,177.807 125.845,174.94 J16.19@125.845,170.799 ; P15.1@90.867,178.417 90.867,183.294 89.052,185.109 78.181,185.109
CHIPA_VN_Y0: J16.38 P38.1 R23.2 U17.2 | length 64.9
  Top Layer w0.15: U17.2@75.432,150.73 79.109,150.73 ; R23.2@79.052,148.351 79.109,148.408 79.109,150.73 ; P38.1@91.748,143.505 102.186,143.505 121.345,162.664 J16.38@121.346,165.649 ; P38.1@91.794,144.038 91.794,148.915 89.98,150.73 79.109,150.73
CHIPA_VN_Y1: J16.29 P1.1 R3.2 U1.2 | length 87.6
  Top Layer w0.15: U1.2@74.255,218.387 77.932,218.387 ; R3.2@77.875,216.009 77.932,216.065 77.932,218.387 ; P1.1@90.572,211.162 102.494,211.162 110.867,202.789 110.867,187.297 117.962,180.201 121.583,180.201 v2(123.473,178.311) ; P1.1@90.618,211.695 90.618,216.572 88.803,218.387 77.932,218.387 ; J16.29@123.346,170.799 123.307,170.838 123.307,173.461 v2(123.473,173.627)
  Bottom Layer w0.15: v2(123.473,173.627) v2(123.473,178.311)
CHIPA_VOUTN_REPLICA: J16.6 P21.1 R9.2 | length 64.9
  Top Layer w0.2: J16.6@129.345,165.649 129.345,164.698 130.167,163.876 134.556,163.876 137.439,166.759 137.439,180.926 157.84,201.327 ; P21.1@155.382,202.907 156.26,202.907 157.84,201.327 ; R9.2@160.891,208.264 160.777,208.15 160.777,204.264 157.84,201.327
CHIPA_VOUTN_REPLICA_INAMP: C16.2 J5.2 U6.10 | length 56.7
  Top Layer w0.2: J5.2@130.483,230.272 130.483,232.131 132.017,233.664 132.017,233.712 132.045,233.712 132.532,233.712 ccw(c132.886,233.712) 133.24,233.712 cw(c133.594,233.712) 133.948,233.712 ccw(c134.302,233.712) 134.656,233.712 cw(c135.01,233.712) 135.364,233.712 ccw(c135.718,233.712) 136.072,233.712 cw(c136.426,233.712) 136.78,233.712 ccw(c137.134,233.712) 137.488,233.712 cw(c137.842,233.712) 138.196,233.712 ccw(c138.55,233.712) 138.904,233.712 cw(c139.258,233.712) 139.612,233.712 ccw(c139.966,233.712) 140.32,233.712 cw(c140.674,233.712) 141.028,233.712 ccw(c141.382,233.712) 141.736,233.712 cw(c142.09,233.712) 142.444,233.712 143.152,233.712 143.558,233.306 cw(c143.808,233.056) 144.058,232.805 ccw(c144.309,232.555) 144.559,232.305 cw(c144.809,232.054) 145.06,231.804 ccw(c145.31,231.554) 145.56,231.303 cw(c145.811,231.053) 146.061,230.803 ccw(c146.311,230.552) 146.561,230.302 cw(c146.812,230.052) 147.062,229.801 ccw(c147.312,229.551) 147.563,229.301 cw(c147.813,229.05) 148.063,228.8 ccw(c148.314,228.55) 148.564,228.3 cw(c148.814,228.049) 149.065,227.799 ccw(c149.315,227.549) 149.565,227.298 150.397,226.467 160.183,226.467 163.107,223.542 C16.2@163.107,221.241 ; U6.10@162.084,216.922 162.084,220.035 162.092,220.035 C16.2@163.107,221.05
CHIPA_VOUTN_X0: J16.10 P20.1 R12.2 | length 94.9
  Top Layer w0.2: J16.10@128.346,165.649 128.345,164.486 129.8,163.031 135.13,163.031 138.727,166.628 138.727,178.763 153.378,193.413 177.453,193.413 186.426,202.386 ; P20.1@183.149,204.786 183.231,204.705 184.107,204.705 186.426,202.386 ; R12.2@189.786,208.241 189.787,208.323 189.672,208.209 189.672,205.633 186.426,202.386
CHIPA_VOUTN_X0_INAMP: C22.2 J7.2 U7.10 | length 40.4
  Top Layer w0.2: J7.2@173.185,230.003 173.185,234.12 175.637,236.572 185.726,236.572 ; 185.697,236.6 185.726,236.572 ; U7.10@190.979,216.981 190.979,220.094 190.987,220.094 C22.2@192.002,221.109 ; C22.2@192.002,221.299 C22.2@192.002,221.749 ; C22.2@192.101,221.575 192.101,224.094 189.321,226.874 189.321,232.977 185.726,236.572
CHIPA_VOUTP_REPLICA: J16.8 P16.1 R10.2 | length 68.1
  Top Layer w0.2: J16.8@128.845,165.649 128.845,164.579 129.957,163.468 134.866,163.468 138.108,166.71 138.108,179.571 158.882,200.345 ; P16.1@161.958,198.02 161.307,198.67 160.558,198.67 158.882,200.345 ; R10.2@162.987,208.336 162.873,208.222 162.873,204.336 158.882,200.345
CHIPA_VOUTP_REPLICA_INAMP: C13.1 J4.2 U6.11 | length 58.6
  Top Layer w0.2: J4.2@110.492,230.246 114.849,225.889 156.32,225.889 160.419,221.79 C13.1@160.419,221.265 ; C13.1@160.419,221.074 161.583,219.909 U6.11@161.583,216.922
CHIPA_VOUTP_X0: J16.12 P14.1 R13.2 | length 97.9
  Top Layer w0.2: J16.12@127.846,165.649 127.845,164.408 129.572,162.681 135.4,162.681 139.142,166.423 139.142,178.325 153.564,192.747 179.608,192.747 187.908,201.047 ; P14.1@191.165,199.249 189.705,199.249 187.908,201.047 ; R13.2@191.883,208.396 191.769,208.281 191.769,204.908 187.908,201.047
CHIPA_VOUTP_X0_INAMP: C17.1 J6.2 U7.11 | length 46.1
  Top Layer w0.2: J6.2@152.5,230.067 152.5,228.392 153.12,227.773 183.4,227.773 188.82,222.352 188.82,221.929 C17.1@189.204,221.545 ; C17.1@189.314,221.133 190.479,219.968 U7.11@190.479,216.981
CHIPA_VP_X0: J16.24 P17.1 R21.2 U11.2 | length 61.5
  Top Layer w0.15: J16.24@124.846,165.649 124.845,162.823 126.324,161.345 138.651,161.345 151.091,173.785 P17.1@154.129,173.785 154.129,167.891 157.546,164.474 U11.2@168.094,164.474 ; 163.543,164.491 R21.2@163.543,166.87
CHIPA_VP_X1: J16.21 P25.1 R22.2 U14.2 | length 67.9
  Top Layer w0.15: U14.2@74.849,158.73 78.166,158.73 ; R22.2@78.11,161.109 78.166,161.053 78.166,158.73 ; J16.21@125.346,170.799 125.345,175.016 123.938,176.423 107.216,176.423 96.216,165.423 P25.1@91.211,165.423 91.211,160.545 89.396,158.73 78.166,158.73
CHIPA_VP_Y0: J16.36 P51.1 R24.2 U21.2 | length 72.5
  Top Layer w0.15: U21.2@75.593,124.443 78.911,124.443 ; R24.2@78.855,126.821 78.911,126.765 78.911,124.443 ; J16.36@121.846,165.649 121.845,158.939 94.042,131.136 P51.1@91.956,131.136 91.956,126.258 90.141,124.443 78.911,124.443
CHIPA_VP_Y1: J16.31 P4.1 R11.2 U4.2 | length 76.7
  Top Layer w0.15: U4.2@74.278,191.718 77.954,191.718 ; R11.2@77.897,194.096 77.954,194.04 77.954,191.718 ; v2@122.408,178.496 121.018,179.887 112.404,179.887 104.375,187.916 104.375,195.718 101.683,198.411 P4.1@90.64,198.411 90.64,193.533 88.825,191.718 77.954,191.718 ; J16.31@122.845,170.799 122.832,170.813 122.832,174.829 122.918,174.915 v2(122.918,175.01)
  Bottom Layer w0.15: 122.5,178.263 122.622,178.14 122.622,176.124 122.841,175.905 122.918,175.828 v2(122.918,175.01)
  other v2: 122.433,178.521
CHIPA_VS: J30.9 J33.64 | length 226.7
  Top Layer w0.2: J30.9@128.345,141.48 128.379,141.515 128.379,142.515 129.994,144.13 134.385,144.13 135.17,143.345 135.17,135.217 133.936,133.983 v2(133.068,133.983)
  Layer 1 w0.2: v2(133.322,129.114) 136.237,129.114 144.361,120.989 144.361,65.902 164.486,45.778 242.185,45.778 242.485,45.478 264.049,45.478 264.958,44.569 264.958,43.049 J33.64@266.144,41.863
  Bottom Layer w0.2: v2(133.068,133.983) 133.068,133.902 133.322,133.647 v2(133.322,129.114)
CHIPA_VTRIG_COMP: J30.14 P28.5 U16.3 | length 117.5
  Top Layer w0.15: J30.14@127.345,135.881 J30.14@127.345,136.33 ; U16.3@181.302,151.759 v1(183.03,151.759)
  Top Layer w0.2: J30.14@127.35,135.923 127.35,132.976 129.145,131.18 133.081,131.18 136.5,134.598 136.5,152.159 141.182,156.841 v1(177.805,156.841) 195.988,156.841 197.96,158.813 202.548,158.813 203.446,157.914 203.446,155.8 202.906,155.26 201.961,155.26 P28.5@201.856,155.155
  Bottom Layer w0.15: v1(177.805,156.841) 180.572,156.841 183.716,153.697 183.716,152.445
  Bottom Layer w0.2: v1(183.03,151.759) 183.716,152.445
CHIPA_VTUNE_PSEUDO: J30.16 P28.3 U16.8 | length 127.7
  Top Layer w0.2: J30.16@126.845,136.33 126.845,132.901 127.583,132.163 v2(127.583,131.748) ; v2(129.482,131.774) 132.633,131.774 135.892,135.032 135.892,153.142 140.524,157.775 196.212,157.775 198.03,159.593 202.925,159.593 203.96,158.559 203.96,153.841 202.734,152.615 P28.3@201.856,152.615 ; U16.8@181.356,148.563 182.364,148.563 v1(182.985,149.183)
  Bottom Layer w0.2: v2(127.583,131.748) 127.595,131.761 129.47,131.761 v2(129.482,131.774) ; v1(176.476,157.762) 180.569,157.762 184.205,154.126 184.205,150.403 v1(182.985,149.183)
CHIPA_X0_CSN_SCL: R59.2 U5.6 U26.36 | length 280.9
  Top Layer w0.15: U5.6@169.506,191.2 169.547,191.24 v2(169.547,192.076)
  Layer 1 w0.15: v2(92.637,50.23) 92.637,38.169 98.543,32.264 117.424,32.264 123.371,26.317 v2(123.371,26.291) ; U26.36@113.705,10.65 115.197,9.158 122.72,9.158 123.082,9.52 v2(123.469,9.52)
  Layer 2 w0.15: v2(92.637,50.23) 93.298,50.891 93.298,83.913 97.953,88.568 97.953,146.141 108.997,157.185 158.217,157.185 166.616,165.584 166.616,189.145 v2(169.547,192.076) ; v2(123.371,26.291) 123.42,26.242 123.42,9.569 v2(123.469,9.52)
  Bottom Layer w0.15: v2(169.547,192.076) 170.744,190.878 R59.2@171.478,190.878
CHIPA_X0_CSN_SDA: R58.2 U5.1 U26.35 | length 282
  Top Layer w0.15: v2(166.221,191.204) 167.445,191.204 U5.1@167.449,191.2
  Layer 1 w0.15: v2(91.905,50.847) 91.905,38.477 103.614,26.769 122.082,26.769 122.306,26.545 v2(122.4,26.545) ; U26.35@116.245,10.65 116.245,10.572 117.338,9.479 122.205,9.479 v2(122.409,9.683)
  Layer 2 w0.15: v2(91.905,50.847) 91.906,83.17 97.477,88.741 97.477,146.089 109.114,157.726 158.334,157.726 166.316,165.708 166.316,191.109 v2(166.221,191.204) ; v2(122.4,26.545) 122.405,26.54 122.405,9.688 v2(122.409,9.683)
  Bottom Layer w0.15: v2(166.221,191.204) 168.108,193.091 171.605,193.091 173.807,190.888 R58.2@173.829,190.888
CHIPA_X0_CSP_SCL: R61.2 U11.6 U26.34 | length 236.4
  Top Layer w0.15: U11.6@170.151,165.124 170.177,165.15 v2(170.177,166.345)
  Layer 2 w0.15: U26.34@118.785,10.65 115.271,14.164 105.815,14.164 94.264,25.715 94.264,41.782 94.113,41.934 94.113,83.634 98.693,88.214 98.693,146.032 109.091,156.43 159.317,156.43 169.231,166.345 v2(170.177,166.345)
  Bottom Layer w0.15: v2(170.177,166.345) 170.719,166.887 R61.2@172.175,166.887
CHIPA_X0_CSP_SDA: R60.2 U11.1 U26.33 | length 245.1
  Top Layer w0.15: U11.1@168.094,165.124 168.117,165.147 v2(168.117,166.33)
  Layer 2 w0.15: U26.33@121.325,10.65 120.446,9.771 118.368,9.771 115.828,12.311 105.302,12.311 92.506,25.107 92.506,36.616 93.598,37.707 93.598,83.543 98.253,88.198 98.253,146.016 109.121,156.885 158.672,156.885 v2(168.117,166.33)
  Bottom Layer w0.15: v2(168.117,166.33) 169.277,167.49 172.668,167.49 172.967,167.192 173.864,167.192 R60.2@174.167,166.889
CHIPA_X1_CSN_SCL: R51.2 U10.6 U26.32 | length 207.4
  Top Layer w0.15: v2(72.238,183.193) 72.238,184.404 U10.6@72.283,184.449
  Layer 1 w0.15: v2(86.413,28.784) 94.204,28.784 96.804,26.183 96.804,25.671 98.441,24.035 98.783,24.035 100.829,21.989 117.424,21.989 U26.32@121.325,25.89
  Layer 2 w0.15: v2(72.238,183.193) 72.238,182.043 73.811,180.469 73.811,167.578 69.062,162.828 69.062,115.282 67.743,113.963 67.743,62.744 82.628,47.86 82.628,32.639 86.413,28.854 v2(86.413,28.784)
  Bottom Layer w0.15: R51.2@71.183,182.916 71.461,183.193 v2(72.238,183.193)
CHIPA_X1_CSN_SDA: R50.2 U10.1 U26.31 | length 205.9
  Top Layer w0.15: v2(74.31,182.884) 74.31,184.419 U10.1@74.34,184.449
  Layer 1 w0.15: v2(86.397,29.916) 93.425,29.916 97.386,25.954 97.386,25.443 98.544,24.285 98.887,24.285 100.883,22.289 115.25,22.289 118.389,25.427 118.389,25.493 U26.31@118.785,25.89
  Layer 2 w0.15: v2(74.31,182.884) 74.31,167.232 69.565,162.487 69.565,154.942 69.565,115.029 68.213,113.676 68.213,62.719 82.928,48.003 82.928,33.269 86.281,29.916 v2(86.397,29.916)
  Bottom Layer w0.15: R50.2@71.17,181.205 72.632,181.205 v2(74.31,182.884)
CHIPA_X1_CSP_SCL: R53.2 U14.6 U26.30 | length 172.4
  Top Layer w0.15: U14.6@72.791,158.081 72.798,158.081 72.875,158.003 v2(72.875,156.959)
  Layer 1 w0.15: v2(86.112,30.827) 93.08,30.827 97.636,26.27 97.636,25.546 98.648,24.535 98.99,24.535 99.688,23.838 107.846,23.838 108.237,24.229 114.584,24.229 U26.30@116.245,25.89
  Layer 2 w0.15: v2(72.875,156.959) 72.875,154.007 69.943,151.075 69.943,114.707 68.513,113.277 68.513,62.843 83.667,47.689 83.667,33.391 85.795,31.262 86.112,30.945 v2(86.112,30.827)
  Bottom Layer w0.15: R53.2@71.319,156.623 72.539,156.623 v2(72.875,156.959)
CHIPA_X1_CSP_SDA: R52.2 U14.1 U26.29 | length 174.6
  Top Layer w0.15: v2(74.765,157.02) 74.765,158.003 74.842,158.081 U14.1@74.849,158.081
  Layer 1 w0.15: v2(86.034,31.919) 93.68,31.919 99.344,26.254 99.344,25.459 100.716,24.088 107.672,24.088 108.113,24.529 112.344,24.529 U26.29@113.705,25.89
  Layer 2 w0.15: v2(74.765,157.02) 74.765,153.138 70.294,148.668 70.294,114.634 68.813,113.152 68.813,63.22 83.966,48.066 83.966,34.094 86.034,32.026 v2(86.034,31.919)
  Bottom Layer w0.15: R52.2@69.264,156.669 69.286,156.669 70.517,155.437 73.181,155.437 v2(74.765,157.02)
CHIPA_Y0_CSN_SCL: R55.2 U17.6 U26.28 | length 157.4
  Top Layer w0.15: U17.6@73.21,150.07 73.219,150.061 v2(73.219,148.568)
  Layer 1 w0.15: v2(86.315,32.752) 93.2,32.752 99.644,26.307 99.644,25.583 100.84,24.388 107.548,24.388 107.989,24.829 110.104,24.829 U26.28@111.165,25.89
  Layer 2 w0.15: v2(73.219,148.568) 73.219,141.633 71.209,139.623 71.209,114.752 69.113,112.655 69.113,63.9 84.266,48.746 84.266,34.471 85.704,33.034 85.939,33.034 86.22,32.752 v2(86.315,32.752)
  Bottom Layer w0.15: R55.2@71.847,147.668 72.15,147.971 72.622,147.971 v2(73.219,148.568)
CHIPA_Y0_CSN_SDA: R54.2 U17.1 U26.27 | length 159.9
  Top Layer w0.15: v2(75.249,148.691) 75.249,150.051 U17.1@75.268,150.07
  Layer 1 w0.15: v2(85.921,33.559) 93.352,33.559 100.126,26.784 100.126,25.525 100.964,24.687 107.423,24.687 U26.27@108.625,25.89
  Layer 2 w0.15: v2(75.249,148.691) 75.249,143.023 71.938,139.712 71.938,114.702 69.477,112.241 69.477,64.418 84.908,48.987 84.908,34.571 v2(85.921,33.559)
  Bottom Layer w0.15: R54.2@70.132,147.644 70.154,147.644 70.457,147.341 70.457,146.97 70.747,146.68 73.238,146.68 v2(75.249,148.691)
CHIPA_Y0_CSP_SCL: R57.2 U21.6 U26.26 | length 124.5
  Top Layer w0.15: v2(73.497,122.355) 73.497,123.753 U21.6@73.536,123.793
  Layer 1 w0.15: v2(86.365,34.281) 93.858,34.281 103.151,24.987 105.183,24.987 U26.26@106.085,25.89
  Layer 2 w0.15: v2(73.497,122.355) 73.497,115.209 69.777,111.489 69.777,65.34 85.383,49.733 85.383,34.839 85.942,34.281 v2(86.365,34.281)
  Bottom Layer w0.15: R57.2@71.597,123.54 72.311,123.54 v2(73.497,122.355)
CHIPA_Y0_CSP_SDA: R56.2 U21.1 U26.25 | length 125.7
  Top Layer w0.15: v2(75.519,122.355) 75.519,123.718 U21.1@75.593,123.793
  Layer 1 w0.15: v2(85.908,35.057) 94.378,35.057 U26.25@103.545,25.89
  Layer 2 w0.15: v2(75.519,122.355) 75.519,116.509 70.077,111.067 70.077,66.369 85.908,50.538 v2(85.908,35.057)
  Bottom Layer w0.15: R56.2@69.806,123.535 69.829,123.535 71.583,121.78 74.944,121.78 v2(75.519,122.355)
CHIPA_Y1_CSN_SCL: R47.2 U1.6 U26.24 | length 241.2
  Top Layer w0.15: v2(72.009,216.64) 72.009,217.702 U1.6@72.034,217.727
  Layer 1 w0.15: v2(65.6,29.101) 66.676,28.025 92.547,28.025 97.062,23.51 v2(98.566,23.51)
  Layer 2 w0.15: v2(65.6,29.101) 65.6,116.924 57.743,124.781 57.743,153.883 59.08,155.22 64.933,155.22 67.571,157.858 67.571,172.331 67.439,172.464 67.439,192.937 72.009,197.507 v2(72.009,216.64) ; v2(98.566,23.51) 98.566,23.582 100.873,25.89 U26.24@101.005,25.89
  Bottom Layer w0.15: R47.2@70.995,216.362 71.61,216.362 v2@71.948,216.7
CHIPA_Y1_CSN_SDA: R46.2 U1.1 U26.23 | length 226.3
  Top Layer w0.15: U1.1@74.091,217.727 74.096,217.722 v2(74.096,216.56)
  Layer 2 w0.15: U26.23@70.525,10.65 66.324,14.851 66.324,117.613 58.043,125.895 58.043,153.55 59.209,154.716 65.094,154.716 67.871,157.493 67.871,178.084 67.762,178.194 67.762,192.404 74.096,198.739 v2(74.096,216.56)
  Bottom Layer w0.15: R46.2@71.04,214.518 72.055,214.518 v2(74.096,216.56)
CHIPA_Y1_CSP_SCL: R49.2 U4.6 U26.22 | length 195.1
  Top Layer w0.15: v2(72.16,189.9) 72.16,191.007 U4.6@72.22,191.068
  Layer 2 w0.15: v2(72.16,189.9) 72.16,188.046 68.055,183.941 68.055,178.325 68.317,178.064 68.317,115.631 67.143,114.457 67.143,62.379 81.564,47.958 81.564,15.616 78.029,12.081 75.794,12.081 74.362,10.65 U26.22@73.065,10.65
  Bottom Layer w0.15: R49.2@71.257,189.648 71.872,189.648 v2@72.012,189.787
CHIPA_Y1_CSP_SDA: R48.2 U4.1 U26.21 | length 198.5
  Top Layer w0.15: U4.1@74.278,191.068 74.341,191.004 v2(74.341,189.88)
  Layer 2 w0.15: v2(74.341,189.88) 74.341,188.551 71.179,185.389 71.179,182.323 73.207,180.295 73.207,168.104 68.65,163.548 68.65,115.54 67.443,114.333 67.443,62.62 82.097,47.966 82.097,15.724 78.154,11.781 76.737,11.781 U26.21@75.605,10.65
  Bottom Layer w0.15: R48.2@71.302,187.804 72.317,187.804 v2@74.358,189.846